# EAGLE board ShaqJr (EAGLE 9.5.1)

Size 160 x 100 mm. Coordinates in mm from the lower left corner, seen from the top.
Outline: 0,0 160,0 160,100 0,100 0,0
Copper layers (1*16): Top 0.035mm / dielectric 1.5mm / Bottom 0.035mm
Design rules "default": minimum track width 6mil, minimum drill 0.35mm, track to track 6mil, track to pad 6mil, pad to pad 6mil, via to via 6mil, smd to smd 6mil, copper to edge 40mil, drill to drill 6mil, minimum pad ring 10mil, minimum via ring 8mil, stop-mask expansion 4mil, vias tented up to drill 0mil, thermal gap 10mil

## Footprints (pad centres in the part's own frame; a part is rotated, then mirrored left to right if it is on the bottom)
C0603 = smd 1.1 x 1: 1 -0.85,0; 2 0.85,0
SOT23-5 = smd 0.55 x 1.2: 1 -0.95,-1.3; 2 0,-1.3; 3 0.95,-1.3; 4 0.95,1.3; 5 -0.95,1.3
USC = smd 0.8 x 0.6: + -1.15,0; - 1.15,0
1X02 = drill 1.016 pad 1.88: 1 0,0; 2 2.54,0
R0603 = smd 1 x 1.1: 1 -0.85,0; 2 0.85,0
USB-MICRO-01.BIGGERPADS = smd 0.4 x 1.7: 1 -1.3,1.505; 2 -0.65,1.505; 3 0,1.505; 4 0.65,1.505; 5 1.3,1.505 | smd 1.9 x 1.9: S1 -3.85,-1.27; S2 -1.2,-1.27; S3 1.2,-1.27; S4 3.85,-1.27 | smd 2.1 x 1.6: S5 -3.1,1.28; S6 3.1,1.28

## Placement (x,y rotation side)
C1  [C0603]  25.4,19.05 0 top
C2  [C0603]  21.59,19.05 0 top
C3  [C0603]  17.78,19.05 0 top
C4  [C0603]  13.97,19.05 0 top
CHRG1  MCP73831  [SOT23-5]  24.13,15.24 0 top
D1  [USC]  13.97,22.86 0 top
D2  [USC]  10.16,22.86 0 top
J1  [1X02]  10.16,13.97 0 top
LDO1  MIC5504  [SOT23-5]  17.78,15.24 0 top
R1  [R0603]  10.16,19.05 0 top
R2  [R0603]  25.4,22.86 0 top
R3  [R0603]  21.59,22.86 0 top
R4  [R0603]  17.78,22.86 0 top
USB1  USB.MICRO-BIGGERPADS  [USB-MICRO-01.BIGGERPADS]  7.62,6.35 0 top

## Library data of the parts
C1-C4 R1-R4 = LinnesLab-Passives
CHRG1 = LinnesLab-Power; PROD_ID: IC-09995
D1 D2 = LinnesLab-DiscreteSemi
J1 USB1 = LinnesLab-Connectors
LDO1 = LinnesLab-Power

## Nets
3.3V: C2.1 LDO1.5
BATT: R3.1 R4.2
CHRG.STAT: C1.1 C4.1 CHRG1.4 D1.- D2.- R2.1
GND: C1.2 C2.2 C3.2 C4.2 J1.1 LDO1.1 LDO1.2 LDO1.3 R1.1 R4.1 USB1.5
N$6: CHRG1.5 R1.2
N$7: CHRG1.1 R2.2
USB+: USB1.3
USB-: USB1.2
V_USB: D2.+ USB1.1
VLIPO: C3.1 CHRG1.3 D1.+ J1.2 R3.2
VSS: CHRG1.2

## Tracks (layer width: path | path; a pad name or v marks a point on that pad's centre or on a via)
3.3V  (1 unrouted)
BATT  (1 unrouted)
CHRG.STAT  (5 unrouted)
GND  (10 unrouted)
N$6  (1 unrouted)
N$7  (1 unrouted)
V_USB  (1 unrouted)
VLIPO  (4 unrouted)